# EAGLE board midi-thru v1 (EAGLE 9.7.0)
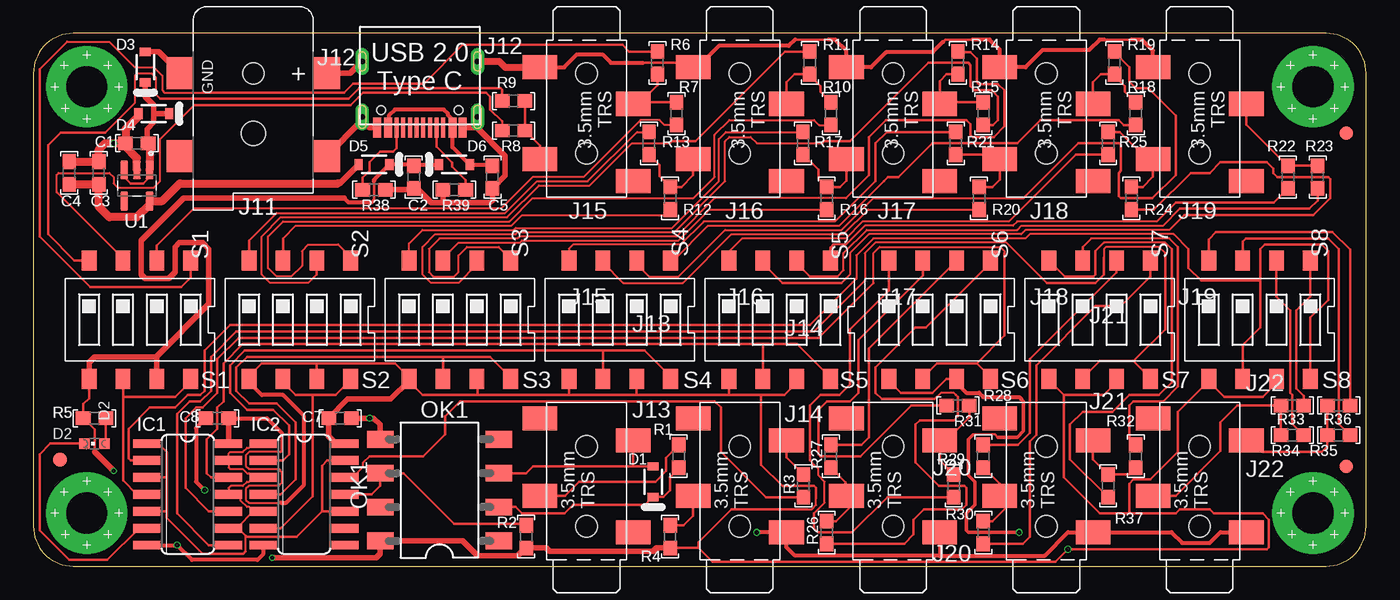
[diagram p0: board, top side]
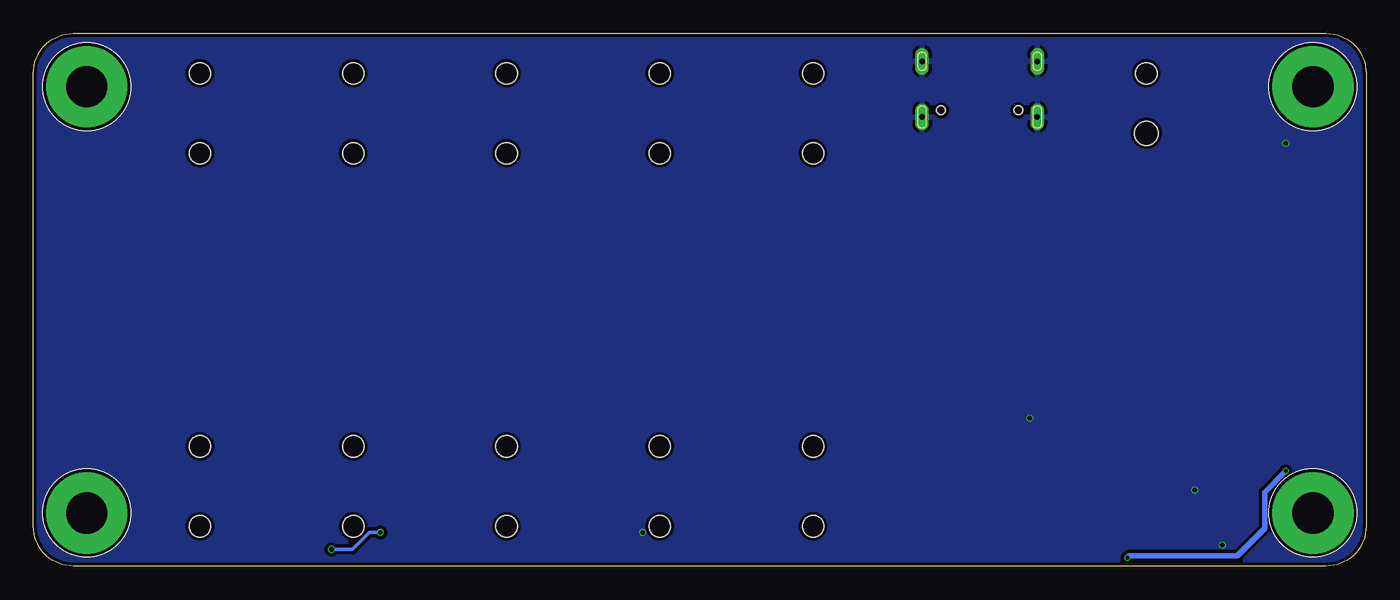
[diagram p1: board, bottom side, seen from below]

Size 100 x 40 mm. Coordinates in mm from the lower left corner, seen from the top.
Outline: 97,40 3,40 arc90 0,37 0,3 arc90 3,0 97,0 arc90 100,3 100,37 arc90 97,40
Copper layers (1*16): Top 0.035mm / dielectric 1.6mm / Bottom 0.035mm
Design rules "jlcpcb-2layers-new *": minimum track width 5mil, minimum drill 0.3mm, track to track 5mil, track to pad 5mil, pad to pad 5mil, via to via 5mil, smd to smd 0mil, copper to edge 0.2mm, drill to drill 6mil, minimum pad ring 8mil, minimum via ring 3mil, stop-mask expansion 4mil, vias tented up to drill 0mil, thermal gap 10mil

## Footprints (pad centres in the part's own frame; a part is rotated, then mirrored left to right if it is on the bottom)
0603_CAP = smd 1.1 x 1: 1 -0.85,0; 2 0.85,0
SOD-323 = smd 0.63 x 0.83: A 1.15,0; C -1.15,0
CHIPLED_0603 = smd 0.8 x 0.8: A 0.75,0; C -0.75,0
FIDUCIAL_ROUND_1MM = smd 1 x 1: 1 0,0
SO14 = smd 0.66 x 2.032: 1 -3.81,-3.073; 2 -2.54,-3.073; 3 -1.27,-3.073; 4 0,-3.073; 5 1.27,-3.073; 6 2.54,-3.073; 7 3.81,-3.073; 8 3.81,3.073; 9 2.54,3.073; 10 1.27,3.073; 11 0,3.073; 12 -1.27,3.073; 13 -2.54,3.073; 14 -3.81,3.073
DCJACK_2MM_SMT = smd 2.4 x 2: PIN1 0,5.5; PIN2 6.2,5.5; SLEEVE 0,-5.5; SLEEVE_BRK 6.2,-5.5 | hole 1.6: 0,0 | hole 1.8: 4.5,0
12402012E212A = smd 0.6 x 1.5: A1_B12 3.2,-3.82; A4_B9 2.45,-3.82; A9_B4 -2.4,-3.82; A12_B1 -3.2,-3.82 | smd 0.3 x 1.5: A5 1.25,-3.82; A6 0.25,-3.82; A7 -0.25,-3.82; A8 -1.25,-3.82; B5 -1.75,-3.82; B6 -0.75,-3.82; B7 0.75,-3.82; B8 1.75,-3.82 | drill 0.4 pad 1 long: P$1 4.32,1.15; P$2 -4.32,1.15; P$3 -4.32,-3.03; P$4 4.32,-3.03 | hole 0.65: 2.89,-2.53; -2.89,-2.53
PJ-327C-4A = smd 1.8 x 2.6: 1 -4.4,-3.5; 2 2.5,-3.5; 3 -1.65,3.5; 4 4.15,3.5 | hole 1.6: -3.95,0; 2.05,0
M3-PANHEAD-VIA = drill 3.1 pad 6.1: P$1 0,0
SMD8 = smd 2 x 1.25: 1 -4.445,3.81; 2 -4.445,1.27; 3 -4.445,-1.27; 4 -4.445,-3.81; 5 4.445,-3.81; 6 4.445,-1.27; 7 4.445,1.27; 8 4.445,3.81
0603-RES = smd 1.1 x 1: 1 -0.85,0; 2 0.85,0
DIP4_2.54 = smd 1.5 x 1.1: 1A -4.45,3.81; 1B 4.45,3.81; 2A -4.45,1.27; 2B 4.45,1.27; 3A -4.45,-1.27; 3B 4.45,-1.27; 4A -4.45,-3.81; 4B 4.45,-3.81
SOT23-5 = smd 1.39 x 0.58: 1 -1.165,0.95; 2 -1.165,0; 3 -1.165,-0.95; 4 1.165,-0.95; 5 1.165,0.95

## Placement (x,y rotation side)
C1  100n  [0603_CAP]  7.77,31.75 180 top
C2  1u  [0603_CAP]  28.54,29.21 270 top
C3  100n  [0603_CAP]  4.91,29.52 90 top
C4  1u  [0603_CAP]  2.69,29.52 90 top
C5  100n  [0603_CAP]  34.44,29.21 270 top
C7  100n  [0603_CAP]  23.01,11.11 0 top
C8  100n  [0603_CAP]  13.8,11.11 180 top
D1  PMEG4005EJ  [SOD-323]  46.51,6.35 90 top
D2  LED0603  [CHIPLED_0603]  4.6,9.21 0 top
D3  PMEG4005EJ  [SOD-323]  8.41,37.46 90 top
D4  10V  [SOD-323]  9.04,33.97 180 top
D5  PMEG4005EJ  [SOD-323]  25.55,30.16 180 top
D6  PMEG4005EJ  [SOD-323]  31.59,30.16 0 top
FD1  FIDUCIALROUND_1MM  [FIDUCIAL_ROUND_1MM]  98.5,32.5 0 top
FD2  FIDUCIALROUND_1MM  [FIDUCIAL_ROUND_1MM]  98.5,7.5 0 top
FD3  FIDUCIALROUND_1MM  [FIDUCIAL_ROUND_1MM]  2,8 0 top
IC1  7414D  [SO14]  11.58,5.39 270 top
IC2  7414D  [SO14]  20.31,5.39 270 top
J11  2.1mm  [DCJACK_2MM_SMT]  16.5,37 270 top
J12  [12402012E212A]  29,36.75 0 top
J13  TRS-TIP-SW3.5MM1  [PJ-327C-4A]  41.5,6.95 90 top
J14  TRS-TIP-SW3.5MM1  [PJ-327C-4A]  53,6.95 90 top
J15  TRS-TIP-SW  [PJ-327C-4A]  41.5,33.05 270 top
J16  TRS-TIP-SW  [PJ-327C-4A]  53,33.05 270 top
J17  TRS-TIP-SW  [PJ-327C-4A]  64.5,33.05 270 top
J18  TRS-TIP-SW  [PJ-327C-4A]  76,33.05 270 top
J19  TRS-TIP-SW  [PJ-327C-4A]  87.5,33.05 270 top
J20  TRS-TIP-SW3.5MM1  [PJ-327C-4A]  64.5,6.95 90 top
J21  TRS-TIP-SW3.5MM1  [PJ-327C-4A]  76,6.95 90 top
J22  TRS-TIP-SW  [PJ-327C-4A]  87.5,6.95 90 top
MP1  SCREW-FASTENER3  [M3-PANHEAD-VIA]  96,4 0 top
MP2  SCREW-FASTENER3  [M3-PANHEAD-VIA]  4,36 0 top
MP3  SCREW-FASTENER3  [M3-PANHEAD-VIA]  4,4 0 top
MP4  SCREW-FASTENER3  [M3-PANHEAD-VIA]  96,36 0 top
OK1  6N137  [SMD8]  30.47,5.71 180 top
R1  220R  [0603-RES]  48.41,8.25 270 top
R2  5K1  [0603-RES]  36.98,2.22 270 top
R3  220R  [0603-RES]  57.78,6.03 90 top
R4  220R  [0603-RES]  47.78,2.22 90 top
R5  5K1  [0603-RES]  4.6,11.11 0 top
R6  220R  [0603-RES]  46.83,37.78 90 top
R7  220R  [0603-RES]  48.25,33.97 270 top
R8  220R  [0603-RES]  36.03,32.7 180 top
R9  220R  [0603-RES]  36.03,34.92 180 top
R10  220R  [0603-RES]  59.84,33.97 270 top
R11  220R  [0603-RES]  58.26,37.78 90 top
R12  220R  [0603-RES]  47.78,27.62 270 top
R13  220R  [0603-RES]  46.19,31.75 90 top
R14  220R  [0603-RES]  69.37,37.78 90 top
R15  220R  [0603-RES]  71.27,33.97 270 top
R16  220R  [0603-RES]  59.52,27.62 270 top
R17  220R  [0603-RES]  57.75,31.75 90 top
R18  220R  [0603-RES]  82.7,33.97 270 top
R19  220R  [0603-RES]  81.11,37.78 90 top
R20  220R  [0603-RES]  70.95,27.62 270 top
R21  220R  [0603-RES]  69.21,31.75 90 top
R22  220R  [0603-RES]  94.13,29.21 270 top
R23  220R  [0603-RES]  96.35,29.21 270 top
R24  220R  [0603-RES]  82.38,27.62 270 top
R25  220R  [0603-RES]  80.64,31.75 270 top
R26  220R  [0603-RES]  59.52,2.54 270 top
R27  220R  [0603-RES]  59.84,8.25 90 top
R28  220R  [0603-RES]  69.37,12.06 180 top
R29  220R  [0603-RES]  69.05,6.03 270 top
R30  220R  [0603-RES]  71.27,2.54 270 top
R31  220R  [0603-RES]  71.27,8.25 90 top
R32  220R  [0603-RES]  82.7,8.25 90 top
R33  220R  [0603-RES]  94.45,12.06 0 top
R34  220R  [0603-RES]  94.45,9.84 0 top
R35  220R  [0603-RES]  97.94,9.84 0 top
R36  220R  [0603-RES]  97.94,12.06 0 top
R37  220R  [0603-RES]  80.64,6.03 270 top
R38  5K1  [0603-RES]  25.55,28.26 180 top
R39  5K1  [0603-RES]  31.59,28.26 0 top
S1  [DIP4_2.54]  8,18.5 270 top
S2  [DIP4_2.54]  20,18.5 270 top
S3  [DIP4_2.54]  32,18.5 270 top
S4  [DIP4_2.54]  44,18.5 270 top
S5  [DIP4_2.54]  56,18.5 270 top
S6  [DIP4_2.54]  68,18.5 270 top
S7  [DIP4_2.54]  80,18.5 270 top
S8  [DIP4_2.54]  92,18.5 270 top
U1  LDO_5V_EN  [SOT23-5]  7.77,28.57 270 top
U$1  [PM_M_MAIN_LOGO1_STOP]  17,16 0 bottom
U$2  [MIDI_THRU_LOGO]  22,27 0 bottom
U$4  [MIDI_THRU_STOP_DM]  7,13 0 bottom

## Library data of the parts
C1 C3 C5 C7 C8 = SPENCER Capacitors; DIELECTRIC: X7R; MANUFACTURER: YAGEO; PART_NO: C0603-100NF-50V; SUPPLIER: MOUSER; TOLERANCE: 10%; VOLTAGE: 50V
C2 C4 = SPENCER Capacitors; DIELECTRIC: X5R; MANUFACTURER: YAGEO; PART_NO: C0603-1UF-50V; SUPPLIER: MOUSER; TOLERANCE: 10%; VOLTAGE: 50V
D1 D3 D5 D6 = SPENCER. diodes; MPN: PMEG4005EJ; PART_NO: SOD323-SCHOTTKY-1A; SUPPLIER: MOUSER
D2 = SPENCER. diodes; PART_NO: LED-0603-RED
D4 = SPENCER. diodes; PART_NO: MM3Z10VST1G; SUPPLIER: MOUSER
FD1-FD3 MP1-MP4 = SPENCER miscellaneous
IC1 IC2 = SPENCER. ics; MPN: 74HC14M/TR; PART_NO: 74HC14-SOIC-14
J11 = SPENCER Connectors; MANUFACTURER: TENSILITY INTERNATIONAL CORP; MPN: 54-00164; PART_NO: DC-2.1-SMD; SUPPLIER: DIGIKEY
J12 = SPENCER Connectors; MANUFACTURER: AMPHENOL; MPN: 12402012E212A; PART_NO: USBC-2.0; SUPPLIER: MOUSER
J13-J22 = SPENCER Connectors; MPN: PJ-327C-4A; PART_NO: PJ-327C-4A
OK1 = SPENCER. ics; MANUFACTURER: LITE-ON; MPN: 6N137S; PART_NO: 6N137-SMD; SUPPLIER: MOUSER
R1 R3 R4 R6-R37 = SPENCER. resistors; MANUFACTURER: YAGEO; PART_NO: R0603-220R; SUPPLIER: MOUSER
R2 R5 R38 R39 = SPENCER. resistors; MANUFACTURER: YAGEO; PART_NO: R0603-5K1; SUPPLIER: MOUSER
S1-S8 = SPENCER. Switches; MANUFACTURER: CUI; MPN: DS04-254-2-04BK-SMT; PART_NO: DIP4-2.54-SMD
U1 = SPENCER. regulators converters; DESCRIPTION: 5V 150 mA Fixed Surface Mount Voltage Regulator - SOT-23; MANUFACTUER: Max Linear; MPN: SPX5205M5-L-5-0/TR; PACKAGE: SOT-23-5; PART_NO: LDO-SOT23-5V
U$1 U$2 U$4 = SPENCER logos

## Nets
5V_REG: C3.1 C4.1 D5.A U1.5
9V_IN: C1.1 D3.C D4.C U1.1 U1.3
+5V: C2.1 C7.1 C8.1 D5.C D6.C IC1.14 IC2.14 OK1.8 R2.2 R4.1 R5.1 S1.2B S1.4B S2.2B S2.4B S3.2B S3.4B S4.2B S4.4B S5.2B S5.4B S6.2B S6.4B S7.2B S7.4B S8.2B S8.4B
CONNECT: J11.SLEEVE_BRK
GND: C1.2 C2.2 C3.2 C4.2 C5.2 C7.2 C8.2 D4.A IC1.7 IC2.7 J11.PIN1 J11.PIN2 J12.A1_B12 J12.A12_B1 J12.P$1 J12.P$2 J12.P$3 J12.P$4 J14.1 J15.1 J16.1 J17.1 J18.1 J19.1 J20.1 J21.1 J22.1 OK1.5 R38.1 R39.1 U1.2
MIDI_DATA_INV: IC1.1 IC1.3 IC1.5 IC1.9 IC1.11 IC1.13 IC2.1 IC2.3 IC2.5 IC2.10 IC2.13
MIDI_IN_SIG: IC2.11 OK1.6 R2.1
N$1: J13.3 R1.1
N$2: D1.A J13.2 OK1.3
N$3: D1.C OK1.2 R1.2
N$4: J16.3 R10.1 R11.1
N$5: IC2.12 R3.1
N$6: J14.2 R3.2
N$7: J14.3 R4.2
N$8: D2.C IC1.6
N$9: D2.A R5.2
N$10: J15.3 R6.1 R7.1
N$11: R6.2 S1.1A
N$12: R7.2 S1.2A
N$13: J15.2 R8.1 R9.1
N$14: R8.2 S1.3A
N$15: R9.2 S1.4A
N$16: IC1.4 S1.1B S1.3B
N$17: J16.2 R12.1 R13.1
N$18: R10.2 S2.1A
N$19: R11.2 S2.2A
N$20: R12.2 S2.3A
N$21: R13.2 S2.4A
N$22: IC2.6 S2.1B S2.3B
N$23: J17.3 R14.1 R15.1
N$24: J17.2 R16.1 R17.1
N$25: IC2.4 S3.1B S3.3B
N$26: R14.2 S3.1A
N$27: R15.2 S3.2A
N$28: R16.2 S3.3A
N$29: R17.2 S3.4A
N$30: J18.3 R18.1 R19.1
N$31: J18.2 R20.1 R21.1
N$32: R18.2 S4.1A
N$33: R19.2 S4.2A
N$34: R20.2 S4.3A
N$35: R21.2 S4.4A
N$36: IC2.2 S4.1B S4.3B
N$37: J19.3 R22.1 R23.1
N$38: J19.2 R24.1 R25.1
N$39: R22.2 S5.1A
N$40: R23.2 S5.2A
N$41: R24.2 S5.3A
N$42: R25.2 S5.4A
N$43: IC1.12 S5.1B S5.3B
N$44: J20.3 R26.1 R27.1
N$45: J20.2 R28.1 R29.1
N$46: IC1.10 S6.1B S6.3B
N$47: R26.2 S6.1A
N$48: R27.2 S6.2A
N$49: R28.2 S6.3A
N$50: R29.2 S6.4A
N$51: J21.3 R30.1 R31.1
N$52: J21.2 R32.1 R37.1
N$53: IC1.8 S7.1B S7.3B
N$54: J22.3 R33.1 R34.1
N$55: J22.2 R35.1 R36.1
N$56: IC1.2 S8.1B S8.3B
N$57: R30.2 S7.1A
N$58: R31.2 S7.2A
N$59: R32.2 S7.3A
N$60: R33.2 S8.1A
N$61: R34.2 S8.2A
N$62: R35.2 S8.3A
N$63: R36.2 S8.4A
N$64: R37.2 S7.4A
N$65: D3.A J11.SLEEVE
N$66: J12.A5 R39.2
N$67: J12.B5 R38.2
VBUS: C5.1 D6.A J12.A4_B9 J12.A9_B4

## Tracks (layer width: path | path; a pad name or v marks a point on that pad's centre or on a via)
5V_REG
  Top 0.406: 22.85,28.73 22.97,28.73 D5.A
  Top 0.61: 22.85,28.73 11,28.73 9.67,27.41 U1.5 8.72,27.14 7.77,26.19 5.71,26.19 4.91,26.98 C3.1 C4.1
9V_IN
  Top 0.203: U1.3 6.82,29.2 7.3,28.73 8.25,28.73 8.72,29.2 U1.1
  Top 0.406: 8.53,31.84 8.53,32.82 9.04,33.34 9.04,33.97 | 9.04,33.97 9.04,34.61 8.41,35.24 D3.C | D4.C 9.04,33.97
  Top 0.61: U1.1 8.72,31.65 C1.1 8.53,31.84
+5V  (via drill 0.3, 0.35)
  Top 0.152: 58.1,4.28 58.41,4.28 58.73,4.6 58.73,5.08 | 18.57,8.57 16.19,8.57 15.95,8.33 15.95,7.54 16.19,7.3 18.41,7.3 18.65,7.06 18.65,6.27 18.41,6.03 16.19,6.03 15.95,5.79 15.95,5 16.19,4.76 18.57,4.76 | 72.38,9.68 72.18,9.88 70.52,9.88 70.48,9.84
  Top 0.203: S8.2B 93.27,13.74 92.23,12.7 89.37,12.7 88.19,13.88 S8.4B 88.19,13.9 85.88,11.59 85.88,8.57 83.81,6.51 82.54,6.51 82.23,6.19 82.23,3.97 | 49.9,1.37 50.95,0.32 76.67,0.32 v77.62,1.27 92.55,1.27 92.7,1.43 92.7,3.49 92.23,3.97 88.58,3.97 88.26,4.28 86.04,4.28 85.72,3.97 82.23,3.97 | R4.1 49.9,1.37 | S7.4B 76.19,13.97 77.31,12.86 | 77.31,12.86 80.32,12.86 81.27,13.8 S7.2B | S6.2B 68.5,14.05 67.46,13.02 65.08,13.02 64.19,13.91 S6.4B | S5.2B 57.27,13.78 56.35,12.86 54.6,12.86 | 54.6,12.86 52.19,12.86 | S5.4B 52.19,12.86 | 49.9,1.37 49.9,1.8 52.38,4.28 58.1,4.28 | 58.73,5.08 58.73,5.87 58.57,6.03 56.19,6.03 54.6,7.62 54.6,12.86 | 4.19,14.35 S1.4B 4.19,12.61 3.75,12.16 R5.1 4.6,10.26 4.6,8.57 | S4.2B 45.27,12.86 | 45.27,12.86 40.19,12.86 | S4.4B 40.19,12.86 | 52.19,12.86 45.27,12.86 | S2.4B 16.19,14.29 17.14,15.24 21.27,15.24 | 21.27,15.24 27.14,15.24 28.19,14.19 S3.4B 28.19,13.87 29.2,12.86 33.33,12.86 | 40.19,12.86 33.33,12.86 | S3.2B 33.33,13.99 33.33,12.86 | 25.55,28.89 25.55,27.46 | S2.2B 21.27,15.23 21.27,15.24 | 82.23,3.97 80,3.97 77.31,6.66 77.31,12.86 | 18.65,10 18.65,8.65 18.57,8.57
  Top 0.254: 74.13,12.54 74.29,12.38 74.29,10.16 73.81,9.68 72.38,9.68 | 70.48,9.84 70.16,9.52 70.16,6.82 70.64,6.35 70.64,4.6 70,3.97 70,2.7 70.16,2.54 v73.97,2.54
  Top 0.305: 25.55,28.89 25.55,29.01 D5.C 28.43,30.16 | 25.55,27.46 25.39,27.3 23.65,27.3 23.33,27.62 | C8.1 17.54,11.11 18.65,10 | 18.57,4.76 18.96,4.76 20.31,6.11 20.31,11.27 18.73,12.86 17.14,12.86 16.5,13.49 16.5,13.74 S2.4B | S6.2B 69.27,13.75 70,13.02 70.95,13.02 71.27,12.7 73.97,12.7 74.13,12.54 | 28.64,30.16 D6.C
  Top 0.406: C8.1 IC1.14 | 23.33,27.62 11.27,27.62 8.09,24.45 8.09,21.91 8.41,21.59 10.15,21.59 10.63,22.06 10.63,23.97 10.95,24.29 12.69,24.29 13.17,23.81 13.17,19.68 9.2,15.71 | 9.2,15.71 4.6,15.71 4.19,15.31 4.19,14.35 | R4.1 46.77,1.37 46.51,1.11 38.73,1.11 38.47,1.37 R2.2 36.93,1.37 36.35,0.79 33.33,0.79 32.22,1.9 OK1.8 26.03,0.95 25.71,0.63 v17.93,0.63 | S3.4B 28.19,13.91 26.82,12.54 23.59,12.54 C7.1 22.16,9.74 22.7,9.21 IC2.14 | 9.2,15.71 9.27,15.64 S1.2B | 4.6,8.57 v6.03,7.14
  Top 0.61: 28.43,30.16 C2.1 28.64,30.16
  Bottom 0.254: v73.97,2.54 74.77,2.54 76.03,1.27 v77.62,1.27
  Bottom 0.406: v6.03,7.14 7.61,5.55 7.61,2.86 9.68,0.79 17.77,0.79 v17.93,0.63
GND  (via drill 0.35)
  Top 0.203: 82.38,39.53 80.32,39.53 | 70.48,39.53 68.41,39.53 68.26,39.37 | 59.68,39.53 57.14,39.53 | J16.1 49.17,37.78 45.71,37.78
  Top 0.305: 67.94,0.79 75.88,0.79 77.64,2.55 J21.1 85.39,2.55 86.19,1.74 88.26,1.74 89.06,2.55 J22.1 | 67.94,0.79 57.14,0.79 56.5,1.43 56.5,2.54 | J14.1 56.5,2.54 | 56.5,2.54 v54.29,2.54 | IC1.7 v10.79,1.59 11.9,0.47 16.82,0.47 17.24,0.89 IC2.7 | C8.2 12.22,10.37 12.22,6.35 v12.85,5.71 | J20.1 68,0.85 67.94,0.79 | J19.1 84,38.7 83.18,39.53 82.38,39.53 | 80.32,39.53 80,39.53 79.21,38.73 75.72,38.73 74.44,37.45 J18.1 72.5,38.77 71.75,39.53 70.48,39.53 | 68.26,39.37 67.46,38.57 63.97,38.57 62.85,37.45 J17.1 61,38.69 60.16,39.53 59.68,39.53 | 57.14,39.53 56.67,39.05 51.43,39.05 49.83,37.45 J16.1 | J15.1 39.83,37.45 40.79,38.41 42.7,38.41 43.33,37.78 45.71,37.78
  Top 0.406: C2.2 28.78,28.36 29.84,27.3 30.79,27.3 | 30.79,27.3 34.28,27.3 34.44,27.46 C5.2 35.39,29.31 35.39,30.8 33.32,32.87 | R39.1 30.73,27.36 30.79,27.3 | C7.2 v25.23,11.11 25.55,11.11 26.03,10.63 OK1.5 | J11.PIN2 24.68,33.48 | 24.68,33.48 J12.P$3 | J12.A12_B1 25.23,32.93 24.68,33.48 | 33.32,32.87 J12.P$4 | J12.A1_B12 33.26,32.93 33.32,32.87 | J11.PIN1 23.78,37 J12.P$2 | R38.1 28.43,28.26
  Top 0.508: J12.P$1 34.96,37.9 35.41,37.45 J15.1
  Top 0.61: 28.43,28.26 C2.2 | J11.PIN2 22,31.05 | C4.2 C3.2 4.91,31.27 5.39,31.75 v6.03,31.75 C1.2 | U1.2 7.77,30.64 6.92,31.49 C1.2 | D4.A 7.89,33.77 6.92,32.8 C1.2
  pour Bottom (isolate 0.254): 3.18,0.36 96.82,0.36 97.23,0.39 97.62,0.47 98,0.61 98.35,0.81 98.67,1.05 98.96,1.33 99.2,1.65 99.39,2 99.53,2.38 99.62,2.77 99.64,3.18 99.64,36.82 99.62,37.23 99.53,37.62 99.39,38 99.2,38.35 98.96,38.67 98.67,38.95 98.35,39.19 98,39.39 97.62,39.53 97.23,39.61 96.82,39.64 3.18,39.64 2.77,39.61 2.38,39.53 2,39.39 1.65,39.19 1.33,38.95 1.04,38.67 0.8,38.35 0.61,38 0.47,37.62 0.38,37.23 0.36,36.82 0.36,3.18 0.38,2.77 0.47,2.38 0.61,2 0.8,1.65 1.04,1.33 1.33,1.05 1.65,0.81 2,0.61 2.38,0.47 2.77,0.39
MIDI_DATA_INV
  Top 0.152: IC2.5 16.5,4.12 16.19,4.44 16.03,4.44 15.55,4.92 15.55,5.08 15.23,5.39 IC1.11 14.66,5.87 14.81,6.03 15.71,6.03 16.03,6.35 16.19,6.35 16.5,6.66 | IC2.3 16.5,6.66 | 16.5,6.66 16.19,6.98 16.03,6.98 15.71,7.3 14.76,7.3 14.66,7.4 IC1.13 14.66,8.47 14.76,8.57 15.71,8.57 16.03,8.89 16.19,8.89 16.5,9.21 IC2.1 | 15.71,0.95 15.79,0.95 15.95,1.11 15.95,2.22
  Top 0.203: IC1.1 9.36,9.21 9.99,8.57 9.99,6.66 | 9.99,6.66 9.99,4.12 | 9.99,6.66 IC1.3 | IC1.9 15.23,2.86 15.31,2.93 | 15.31,2.93 16.5,4.12 | 9.99,4.12 9.99,3.65 12.69,0.95 15.71,0.95 | 15.31,2.93 15.95,2.3 15.95,2.22 19.76,2.22 21.66,4.12 | IC1.5 9.99,4.12 | 21.66,4.12 IC2.10 | IC2.13 22.06,7.94 21.66,7.54 21.66,4.12
MIDI_IN_SIG
  Top 0.203: R2.1 36.88,3.17 31.59,3.17 27.77,6.98 OK1.6 26.03,6.03 25.39,5.39 IC2.11
N$1
  Top 0.203: R1.1 47.46,8.15 47.46,7.14 46.67,6.35 40.95,6.35 39.9,5.3 J13.3
N$2
  Top 0.203: D1.A 45.08,7.5 | 45.08,7.5 37.5,7.5 36.98,6.98 OK1.3 | 45.08,7.5 45,7.58 J13.2
N$3
  Top 0.203: R1.2 48.41,7.3 47.78,6.66 47.78,5.71 47.26,5.2 D1.C 45.91,4.6 40.48,4.6 39.84,3.97 36.66,3.97 36.19,4.44 OK1.2
N$4
  Top 0.203: J16.3 56.5,36.34 57.09,36.93 R11.1 58.26,36.83 59.05,36.03 59.05,35.61 R10.1
N$5
  Top 0.152: 25.23,8.25 24.76,7.78 24.76,7.46 23.96,6.66 IC2.12
  Top 0.203: R3.1 54.98,5.18 51.59,8.57 51.59,11.9 51.11,12.38 32.02,12.38 30.89,11.25 30.89,9.9 29.25,8.25 25.23,8.25
N$6
  Top 0.203: R3.2 56.5,8.16 J14.2
N$7
  Top 0.203: R4.2 48.79,3.07 49.5,3.78 J14.3
N$8
  Top 0.203: D2.C 1.26,9.21 0.47,8.41 0.47,2.7 2.69,0.47 5.55,0.47 7.93,2.86 IC1.6
N$9
  Top 0.203: R5.2 5.45,9.3 D2.A
N$10
  Top 0.203: R7.1 45.55,34.82 | 45.55,34.82 45.12,34.82 J15.3 | R6.1 46.83,36.09 45.55,34.82
N$11
  Top 0.152: 2.53,39.37 5.71,39.37 7.61,37.46 9.04,37.46 9.68,36.83 9.68,35.72 9.84,35.56 12.69,35.56
  Top 0.203: 2.53,39.37 0.47,37.3 0.47,24.76 4.28,20.95 11.11,20.95 11.81,21.66 S1.1A | R6.2 44.7,38.63 44.21,39.13 32.22,39.13 29.32,36.22 23.99,36.22 23.33,35.56 12.69,35.56
N$12
  Top 0.152: R7.2 47.36,33.12 46.98,33.49 45.55,33.49 41.27,29.21 37.46,29.21 35.08,26.83 12.03,26.83 9.27,24.06
  Top 0.203: S1.2A 9.27,24.06
N$13
  Top 0.203: R9.1 R8.1 38,31.58 J15.2
N$14
  Top 0.152: 35.18,33.39 R8.2 | 12.06,34.61 9.52,32.06 9.52,28.89 9.04,28.41 6.34,28.41 6.03,28.73 6.03,29.21 5.71,29.52 1.9,29.52 1.74,29.37 1.74,28.1
  Top 0.203: 35.18,33.39 34.28,34.29 34.28,35.24 33.97,35.56 24.76,35.56 23.81,34.61 12.06,34.61 | S1.3A 6.73,23.11 1.74,28.1
N$15
  Top 0.152: 9.52,35.08 9.2,35.4 9.2,36.67 8.88,36.99 7.77,36.99 7.61,36.83 7.61,34.76 5.39,32.54
  Top 0.203: 5.39,32.54 2.06,32.54 1.1,31.59 1.1,24.92 3.08,22.95 S1.4A | R9.2 35.18,35.77 35.06,35.89 24.45,35.89 23.65,35.08 9.52,35.08
N$16
  Top 0.203: S1.3B 6.73,12.7 | 6.73,12.7 6.73,6.44 7.77,5.39 IC1.4 | 6.73,12.7 10.63,12.7 11.81,13.88 S1.1B
N$17
  Top 0.203: J16.2 49.5,29.34 48.63,28.47 R12.1 46.98,29.26 46.98,30.1 R13.1
N$18
  Top 0.152: 22.85,24.13 20.63,24.13 20.16,23.65 20.16,22.54 19.36,21.75 18.25,21.75 17.62,22.38 17.62,24.76 18.73,25.87 35.71,25.87 37.46,27.62 49.52,27.62 51.11,29.21 51.11,32.38 52.22,33.49 58.57,33.49 58.95,33.12 R10.2
  Top 0.203: 22.85,24.13 23.81,23.17 S2.1A
N$19
  Top 0.152: 21.27,21.91 20.63,21.27 17.77,21.27 17.14,21.91 17.14,24.76 18.57,26.19 35.55,26.19 37.94,28.57 41.74,28.57 44.92,31.75 47.78,31.75
  Top 0.203: 47.78,31.75 47.94,31.91 49.68,31.91 56.41,38.63 R11.2 | S2.2A 21.27,21.91
N$20
  Top 0.152: 18.73,24.61 19.68,25.56 35.87,25.56 36.66,26.35 47.36,26.35 R12.2
  Top 0.203: S2.3A 18.73,24.61
N$21
  Top 0.152: R13.2 45.29,32.6 41.59,28.89 37.78,28.89 35.39,26.51 18.25,26.51 16.19,24.45
  Top 0.203: 16.19,24.45 S2.4A
N$22
  Top 0.203: 20.95,12.86 19.68,12.86 18.73,13.8 S2.3B | 20.95,12.86 22.7,12.86 23.81,13.97 S2.1B | 20.95,12.86 20.95,5.24 18.57,2.86 IC2.6
N$23
  Top 0.203: R14.1 68.52,36.93 68,36.41 J17.3 68.12,34.82 R15.1
N$24
  Top 0.203: J17.2 61,28.94 60.53,28.47 R16.1 58.89,29.11 58.89,29.76 R17.1
N$25
  Top 0.203: 30.79,15.71 34.28,15.71 35.81,14.19 S3.1B | S3.3B 30.73,15.65 30.79,15.71 | 30.79,15.71 16.03,15.71 15.23,14.92 15.23,13.17 16.19,12.22 18.25,12.22 19.68,10.79 19.68,6.51 18.57,5.39 IC2.4
N$26
  Top 0.152: S3.1A 35.81,23.08 34.92,23.97 32.54,23.97 31.9,23.33 31.9,22.06 31.59,21.75 30,21.75 29.68,22.06 29.68,23.81 30.47,24.6 36.35,24.6 36.51,24.76 48.25,24.76 51.11,27.62 60.95,27.62
  Top 0.203: R14.2 69.37,38.57 70.32,38.57 70.8,38.1 70.8,36.35 70.95,36.19 72.38,36.19 72.86,35.72 72.86,33.02 72.07,32.22 70.48,32.22 70.32,32.38 70.32,33.18 70,33.49 63.97,33.49 62.7,32.22 62.7,29.37 60.95,27.62
N$27
  Top 0.152: S3.2A 33.27,22.64 31.9,21.27 29.84,21.27 29.2,21.91 29.2,23.97 30.16,24.92 36.19,24.92 36.35,25.08 48.09,25.08 51.91,28.89 51.91,31.91 52.22,32.22 53.81,32.22 54.29,31.75 58.89,31.75
  Top 0.203: 58.89,31.75 59.21,31.75 59.37,31.91 61.27,31.91 67.14,37.78 70.16,37.78 70.32,37.62 70.32,36.03 70.64,35.72 71.91,35.72 72.38,35.24 72.38,33.49 72.01,33.12 R15.2
N$28
  Top 0.152: S3.3A 30.73,23.11 31.9,24.29 36.51,24.29 36.66,24.45 48.41,24.45 50.74,26.77 R16.2
N$29
  Top 0.152: S3.4A 28.19,24.23 29.2,25.24 36.03,25.24 36.19,25.4 47.94,25.4 51.43,28.89 51.43,32.06 51.96,32.6 R17.2
N$30
  Top 0.203: J18.3 79.5,36.32 80.11,36.93 R19.1 81.11,36.83 81.91,36.03 81.91,35.61 R18.1
N$31
  Top 0.203: R20.1 71.96,28.47 72.5,29.01 J18.2 72.15,30.9 R21.1
N$32
  Top 0.152: S4.1A 48.03,22.95 50.63,25.56 60.48,25.56 63.81,28.89
  Top 0.203: 63.81,28.89 64.13,29.21 64.92,29.21 67.46,31.75 73.81,31.75 75.56,33.49 81.43,33.49 81.81,33.12 R18.2
N$33
  Top 0.152: S4.2A 45.27,22.67 46.19,21.75 48.41,21.75 51.91,25.24 60.64,25.24 63.02,27.62 74.29,27.62 78.42,31.75
  Top 0.203: 78.42,31.75 81.43,31.75 81.59,31.59 81.59,29.68 81.43,29.52 81.43,27.78 81.59,27.62 83.97,27.62 85.72,29.37 85.72,33.81 83.66,35.88 82.7,35.88 82.23,36.35 82.23,37.46 81.11,38.57 R19.2
N$34
  Top 0.152: S4.3A 42.73,22.79 44.25,21.27 48.73,21.27 52.38,24.92 60.8,24.92 62.64,26.77 R20.2
N$35
  Top 0.152: 61.11,26.83 60.16,25.87 50.32,25.87 48.57,24.13 40.48,24.13 40.19,23.84 S4.4A
  Top 0.203: R21.2 64.03,32.6 63.18,31.75 63.18,28.89 61.11,26.83
N$36
  Top 0.203: 42.7,16.19 45.87,16.19 47.81,14.25 S4.1B | S4.3B 42.73,16.16 42.7,16.19 | 42.7,16.19 15.87,16.19 14.76,15.08 14.76,13.02 16.03,11.74 18.01,11.74 19.2,10.55 19.2,8.41 18.73,7.94 IC2.2
N$37
  Top 0.203: R23.1 R22.1 94.08,30.06 91,33.13 J19.3
N$38
  Top 0.203: R24.1 83.23,28.47 84,29.23 84,30.48 | R25.1 81.53,32.6 83.66,30.48 84,30.48 | J19.2 84,30.48
N$39
  Top 0.152: 85.72,27.3 84.29,25.87 73.81,25.87 73.5,25.56 62.38,25.56 60.95,24.13 60,24.13 59.81,23.94
  Top 0.203: R22.2 93.08,27.3 85.72,27.3 | S5.1A 59.81,23.94
N$40
  Top 0.152: 86.04,26.83 84.77,25.56 74.13,25.56 73.81,25.24 62.54,25.24 60.8,23.49 60.8,22.22 60.32,21.75
  Top 0.203: S5.2A 57.27,22.73 58.26,21.75 60.32,21.75 | 86.04,26.83 95.72,26.83 96.35,27.46 R23.2
N$41
  Top 0.152: 86.35,26.35 85.24,25.24 74.45,25.24 74.13,24.92 62.7,24.92 61.27,23.49 61.27,21.91 60.64,21.27
  Top 0.203: R24.2 84.08,26.77 86.83,29.52 88.26,29.52 89.05,30.32 92.55,30.32 93.02,29.84 93.02,29.52 93.34,29.21 97.15,29.21 97.31,29.05 97.31,27.62 96.04,26.35 86.35,26.35 | 60.64,21.27 56.19,21.27 54.73,22.73 S5.3A
N$42
  Top 0.152: 73.97,26.67 73.18,25.87 62.22,25.87 60.95,24.6 53.17,24.6 52.19,23.62 S5.4A
  Top 0.203: R25.2 78.2,30.9 73.97,26.67
N$43
  Top 0.203: 54.76,16.67 57.3,16.67 59.81,14.16 S5.1B | S5.3B 54.73,16.63 54.76,16.67 | 54.76,16.67 15.71,16.67 14.28,15.24 14.28,12.38 13.8,11.9 13.8,10.32 13.01,9.52 13.01,6.98 13.33,6.66 IC1.12
N$44
  Top 0.203: R26.1 60.22,3.39 61.98,5.15 J20.3 60.95,6.3 R27.1
N$45
  Top 0.203: R28.1 70.22,11.17 68.5,9.45 J20.2 68,7.93 R29.1
N$46
  Top 0.152: 72.86,23.49 72.86,23.65 72.54,23.97 63.49,23.97 63.02,23.49 63.02,21.27
  Top 0.203: 70.8,15.24 67.78,15.24 66.73,14.19 S6.3B | 70.8,15.24 72.86,17.3 72.86,23.49 | 63.02,21.27 58.89,17.14 15.39,17.14 13.8,15.55 13.8,13.02 12.69,11.9 12.22,11.9 11.42,11.11 11.42,5.87 13.17,4.12 IC1.10 | S6.1B 71.81,14.22 70.8,15.24
N$47
  Top 0.152: 67.62,12.54 68.1,13.02 69.05,13.02 69.21,12.86
  Top 0.203: 67.62,12.54 63.65,12.54 63.18,13.02 63.18,14.92 66.19,17.94 66.99,17.94 71.81,22.76 S6.1A | R26.2 65.34,1.69 66.03,2.38 66.03,3.49 66.83,4.28 69.69,4.28 70,4.6 70,5.87 69.84,6.03 67.94,6.03 66.19,7.78 66.19,10.63 66.51,10.95 69.05,10.95 69.37,11.27 69.37,12.7 69.21,12.86
N$48
  Top 0.203: S6.2A 69.27,22.92 62.7,16.35 62.7,9.68 62.12,9.1 R27.2
N$49
  Top 0.203: R28.2 65.88,12.06 62.06,8.25 59.05,8.25 58.89,8.41 58.89,11.74 59.52,12.38 61.27,12.38 61.91,13.02 61.91,16.98 66.73,21.81 S6.3A
N$50
  Top 0.152: 58.57,3.97 59.37,4.76 59.37,6.35 58.89,6.82 58.89,7.3 58.57,7.62
  Top 0.203: R29.2 64.07,5.18 61.43,2.54 58.89,2.54 58.57,2.86 58.57,3.97 | 58.57,7.62 58.26,7.94 58.26,12.06 59.05,12.86 60.48,12.86 61.27,13.65 61.27,17.78 64.19,20.7 S6.4A
N$51
  Top 0.203: R30.1 71.96,3.39 73.73,5.15 J21.3 72.5,6.18 R31.1
N$52
  Top 0.203: R32.1 82.18,6.88 R37.1 79.5,8.02 J21.2
N$53
  Top 0.152: 84.92,23.49 84.45,23.97 80.48,23.97 80.32,23.81 80.32,23.18 | 76.03,21.27 73.02,24.29 63.18,24.29 62.38,23.49 62.38,21.43
  Top 0.203: 82.54,15.4 80,15.4 78.73,14.12 S7.3B | 82.54,15.4 84.92,17.78 84.92,23.49 | 80.32,23.18 80.32,21.91 79.69,21.27 76.03,21.27 | 62.38,21.43 58.57,17.62 15.23,17.62 13.33,15.71 13.33,13.17 12.53,12.38 11.74,12.38 10.79,11.43 10.79,3.97 13.17,1.59 IC1.8 | S7.1B 83.81,14.13 82.54,15.4
N$54
  Top 0.203: R34.1 R33.1 90.32,12.06 89.05,10.79 89.05,8.64 85.71,5.3 J22.3
N$55
  Top 0.203: R36.1 R35.1 97.09,8.99 96.67,8.57 92.2,8.57 91.32,9.45 J22.2
N$56
  Top 0.152: 86.67,23.81 85.56,24.92 74.77,24.92 74.45,24.6 63.02,24.6 61.75,23.33 61.75,21.59
  Top 0.203: 92.07,21.43 92.07,23.81 92.39,24.13 96.67,24.13 97.15,23.65 97.15,20 95.81,18.66 S8.1B | 92.07,21.43 92.07,17.94 90.73,16.6 S8.3B | 92.07,21.43 87.62,21.43 86.67,22.38 86.67,23.81 | 61.75,21.59 58.26,18.09 14.76,18.09 12.85,16.19 12.85,13.17 12.53,12.86 11.58,12.86 10.63,11.9 8.73,11.9 7.14,10.32 7.14,8.09 7.3,7.94 IC1.2
N$57
  Top 0.203: R30.2 74.23,1.69 74.77,2.22 74.77,9.36 75.24,9.84 75.24,15.08 79.69,19.52 81.59,19.52 83.81,21.74 S7.1A
N$58
  Top 0.203: R31.2 73.87,9.1 74.77,10 74.77,15.55 81.27,22.06 S7.2A
N$59
  Top 0.152: 85.88,23.97 85.24,24.6 79.37,24.6 78.73,23.96
  Top 0.203: R32.2 82.23,9.58 82.23,12.06 82.54,12.38 84.77,12.38 85.88,13.49 85.88,23.97 | 78.73,23.96 S7.3A
N$60
  Top 0.203: R33.2 95.3,12.8 94.77,13.33 94.77,19.21 95.81,20.25 S8.1A
N$61
  Top 0.203: R34.2 94.45,10.69 94.45,12.86 94.29,13.02 94.29,19.21 93.27,20.23 S8.2A
N$62
  Top 0.203: R35.2 97.94,10.69 97.94,23.81 97.15,24.6 90.96,24.6 90.73,24.38 S8.3A
N$63
  Top 0.203: R36.2 98.79,23.75 97.47,25.08 88.73,25.08 88.19,24.54 S8.4A
N$64
  Top 0.152: 79.69,23.65 80.32,24.29 84.92,24.29 85.4,23.81
  Top 0.203: R37.2 77.78,8.04 77.78,10.63 78.73,11.59 80.96,11.59 82.23,12.86 84.45,12.86 85.4,13.81 85.4,23.81 | S7.4A 77.39,21.75 79.53,21.75 79.69,21.91 79.69,23.65
N$65
  Top 0.406: J11.SLEEVE 9.39,38.61 D3.A
N$66
  Top 0.203: R39.2 32.44,28.99 31.43,30 31.43,30.3 30.25,31.48 J12.A5
N$67
  Top 0.203: R38.2 24.7,29.15 25.23,29.68 25.23,30.32 26.03,31.11 26.98,31.11 27.25,31.38 J12.B5
VBUS
  Top 0.305: C5.1 34.34,30.16 D6.A 31.45,31.45 J12.A4_B9 31.45,33.52 31.11,33.87 31.11,33.97 30.79,34.29 27.14,34.29 26.66,33.81 26.66,32.99 J12.A9_B4

## Text on the board
_tPlace: J12
_tNames: D3 | R6 | R11 | R14 | R19 | R9 | R7 | R10 | R15 | R18 | D4 | C1 | D5 | D6 | R8 | R13 | R17 | R21 | R25 | R22 | R23 | C4 | C3 | R38 | C2 | R39 | C5 | J11 | J15 | R12 | J16 | R16 | J17 | R20 | J18 | R24 | J19 | U1 | S1 | S2 | S3 | S4 | S5 | S6 | S7 | S8 | R28 | J21 | R5 | C8 | C7 | OK1 | J13 | J14 | R33 | R36 | D2 | IC1 | IC2 | R1 | R31 | R32 | D1 | R29 | R34 | R35 | R27 | J22 | R3 | R2 | R30 | R37 | R26 | R4 | J20